# EAGLE board PRoMo_Base_CMS (EAGLE 6.4)

Size 48 x 98 mm. Coordinates in mm from the lower left corner, seen from the top.
Outline: 0,0 48,0 48,98 0,98 0,0
Copper layers (1*2*15*16): Top 0.035mm / dielectric 0.2mm / Route2 0.0175mm / dielectric 1.1mm / Route15 0.0175mm / dielectric 0.2mm / Bottom 0.035mm
Design rules "SeeedStudio_DRU_no_angle_20130527": minimum track width 6mil, minimum drill 12mil, track to track 6mil, track to pad 6mil, pad to pad 6mil, via to via 6mil, smd to smd 0mil, copper to edge 10mil, drill to drill 10mil, minimum pad ring 6mil, minimum via ring 6mil, stop-mask expansion 2mil, vias tented up to drill 25mil, thermal gap 10mil

## Footprints (pad centres in the part's own frame; a part is rotated, then mirrored left to right if it is on the bottom)
4P-6.2X6.2 = drill 1.016 pad 1.651 square: 1 -3.937,2.159 | drill 1.016 pad 1.651: 2 -3.937,-2.159; 3 3.937,-2.159; 4 3.937,2.159
ELECTRO-5.3MM = drill 0.8 pad 1.35 square: + -1,0 | drill 0.8 pad 1.35: - 1,0
C1206 = smd 1.27 x 2.032: 1 -1.651,0; 2 1.651,0
DO-214AB = smd 2.286 x 4.064: 1 -3.683,0; 2 3.683,0
TQFP44 = smd 1.5 x 0.5: 1 -5.8,4; 2 -5.8,3.2; 3 -5.8,2.4; 4 -5.8,1.6; 5 -5.8,0.8; 6 -5.8,0; 7 -5.8,-0.8; 8 -5.8,-1.6; 9 -5.8,-2.4; 10 -5.8,-3.2; 11 -5.8,-4; 23 5.8,-4; 24 5.8,-3.2; 25 5.8,-2.4; 26 5.8,-1.6; 27 5.8,-0.8; 28 5.8,0; 29 5.8,0.8; 30 5.8,1.6; 31 5.8,2.4; 32 5.8,3.2; 33 5.8,4 | smd 0.5 x 1.5: 12 -4,-5.8; 13 -3.2,-5.8; 14 -2.4,-5.8; 15 -1.6,-5.8; 16 -0.8,-5.8; 17 0,-5.8; 18 0.8,-5.8; 19 1.6,-5.8; 20 2.4,-5.8; 21 3.2,-5.8; 22 4,-5.8; 34 4,5.8; 35 3.2,5.8; 36 2.4,5.8; 37 1.6,5.8; 38 0.8,5.8; 39 0,5.8; 40 -0.8,5.8; 41 -1.6,5.8; 42 -2.4,5.8; 43 -3.2,5.8; 44 -4,5.8
2P-2.54-65/35MIL = drill 0.889 pad 1.651 square: 1 0,1.27 | drill 0.889 pad 1.651: 2 0,-1.27
MINI-5P = drill 0.635 pad 1.27: DM -1.016,0.75; DP 0.254,0; GND 0.254,-1.524; ID -1.016,-0.75; VCC 0.254,1.524 | drill 0.7 pad 1.27 long: S1 -5.842,3.85; S2 -1.016,3.85; S3 -5.842,-3.85; S4 -1.016,-3.85
20P-2.54 = drill 0.889 pad 1.651 square: 1 -25.4,0 | drill 0.889 pad 1.651: 2 -22.86,0; 3 -20.32,0; 4 -17.78,0; 5 -15.24,0; 6 -12.7,0; 7 -10.16,0; 8 -7.62,0; 9 -5.08,0; 10 -2.54,0; 11 0,0; 12 2.54,0; 13 5.08,0; 14 7.62,0; 15 10.16,0; 16 12.7,0; 17 15.24,0; 18 17.78,0; 19 20.32,0; 20 22.86,0
6P-2.54-60/35MIL = drill 0.889 pad 1.524 square: 1 0,6.35 | drill 0.889 pad 1.524: 2 0,3.81; 3 0,1.27; 4 0,-1.27; 5 0,-3.81; 6 0,-6.35
JP2 = drill 0.914 long: 1 -2.54,0; 2 0,0; 3 2.54,0
LED-1206 = smd 1.5 x 1.5: + -1.6,0; - 1.6,0
BORNIER_COUDEE_3.5 = drill 0.8 pad 1.524 square: GND 2.057,1.27 | drill 0.8 pad 1.524: VCC 5.588,1.27
R1206 = smd 1.27 x 1.524: 1 -1.27,0; 2 1.27,0
R0204/7 = drill 0.813 octagon: 1 -3.81,0; 2 3.81,0
PTH08080W = drill 1.4 pad 2.54: P$1 2.032,10.414; P$2 2.032,6.858; P$3 2.032,3.302; P$4 14.224,2.032; P$5 14.224,11.684
SOT223 = smd 1.27 x 2.286: 1 -2.286,-3.175; 2 0,-3.175; 3 2.286,-3.175 | smd 3.556 x 2.159: TER 0,3.175
SSOP28 = smd 0.4 x 1.5: 1 -4.225,-3.625; 2 -3.575,-3.625; 3 -2.925,-3.625; 4 -2.275,-3.625; 5 -1.625,-3.625; 6 -0.975,-3.625; 7 -0.325,-3.625; 8 0.325,-3.625; 9 0.975,-3.625; 10 1.625,-3.625; 11 2.275,-3.625; 12 2.925,-3.625; 13 3.575,-3.625; 14 4.225,-3.625; 15 4.225,3.625; 16 3.575,3.625; 17 2.925,3.625; 18 2.275,3.625; 19 1.625,3.625; 20 0.975,3.625; 21 0.325,3.625; 22 -0.325,3.625; 23 -0.975,3.625; 24 -1.625,3.625; 25 -2.275,3.625; 26 -2.925,3.625; 27 -3.575,3.625; 28 -4.225,3.625

## Placement (x,y rotation side)
BP_RESET  [4P-6.2X6.2]  -44,47.5 0 top  (outside the outline)
BP_USER  [4P-6.2X6.2]  -36.5,21 0 top  (outside the outline)
C1  100µF  [ELECTRO-5.3MM]  -56,104 0 top  (outside the outline)
C2  100nF  [C1206]  -65.5,85.5 0 top  (outside the outline)
C3  100nF  [C1206]  -65.5,66.5 0 top  (outside the outline)
C4  100nF  [C1206]  -65.5,61 0 top  (outside the outline)
C6  100nF  [C1206]  -65.5,55.5 0 top  (outside the outline)
C7  10µF  [C1206]  -65.5,50 0 top  (outside the outline)
C8  100nF  [C1206]  -33.5,-3.5 0 top  (outside the outline)
C10  100µF  [ELECTRO-5.3MM]  -48,104 0 top  (outside the outline)
C11  10µF  [C1206]  -65.5,81.5 0 top  (outside the outline)
D1  [DO-214AB]  -39.5,104 0 top  (outside the outline)
D2  [DO-214AB]  -39.5,113 0 top  (outside the outline)
IC1  DSPIC33FJ128MC804-PT  [TQFP44]  20.75,38.83 0 top
J1  [2P-2.54-65/35MIL]  -52,37.5 0 top  (outside the outline)
J2  [2P-2.54-65/35MIL]  -52,31.5 0 top  (outside the outline)
J3  [MINI-5P]  5,89.5 270 top
J4  [20P-2.54]  3.5,33 270 top
J5  [6P-2.54-60/35MIL]  14.5,1.5 90 top
J6  [20P-2.54]  44,33.5 270 top
JP1  [JP2]  14,93 270 top
LED3V3  [LED-1206]  -64.5,75 0 top  (outside the outline)
LED5V  [LED-1206]  -57,89 0 top  (outside the outline)
LED_DEBUG1  [LED-1206]  -50.5,25 0 top  (outside the outline)
LED_DEBUG2  [LED-1206]  -45,40.5 0 top  (outside the outline)
LED_RX1  [LED-1206]  -32.5,5 0 top  (outside the outline)
LED_TX1  [LED-1206]  -32.5,0 0 top  (outside the outline)
P1  Bornier  [BORNIER_COUDEE_3.5]  17,89 0 top
R1  56  [R1206]  -58.5,95 0 top  (outside the outline)
R2  10k  [R1206]  -46.5,54.5 0 top  (outside the outline)
R3  56  [R1206]  -48,32 0 top  (outside the outline)
R4  10k  [R1206]  -52,13.5 0 top  (outside the outline)
R5  56  [R1206]  -33.5,11 0 top  (outside the outline)
R6  353  [R0204/7]  -56,98.5 0 top  (outside the outline)
R7  56  [R1206]  -66,71.5 0 top  (outside the outline)
R8  10k  [R1206]  -33.5,-9 0 top  (outside the outline)
R10  56  [R1206]  -46.5,37 0 top  (outside the outline)
R11  56  [R1206]  -28.5,11 0 top  (outside the outline)
REG1  PTH08080W  [PTH08080W]  6.5,70 0 top
U1  CJ1117-3.3-1310190P1  [SOT223]  -65,92.5 0 top  (outside the outline)
U2  FT232R-SSOP28  [SSOP28]  17.5,60 270 top

## Library data of the parts
BP_RESET BP_USER C1-C4 C6-C8 C10 C11 D1 D2 LED3V3 LED5V LED_DEBUG1 LED_DEBUG2 LED_RX1 LED_TX1 R1-R8 R10 R11 = Discrete
IC1 = microchip-dspic33fjxxmc
J1-J6 = Connector 
JP1 = jumper
P1 REG1 = Perso
U1 = OPL
U2 = IC

## Nets
!MCLR!: BP_RESET.1 BP_RESET.4 IC1.18 J5.1 R2.1
+3V3: C3.1 C4.1 C6.1 C11.1 IC1.17 IC1.28 IC1.40 J5.2 R2.2 R4.2 R5.2 R7.1 R11.2 U1.2 U1.TER U2.4
+5V: C1.+ C2.1 D2.1 J3.VCC JP1.3 R1.1 R8.1 REG1.P$5 U1.3 U2.20
AN0: IC1.19
AN1: IC1.20
AN4: IC1.23
AN5/MISO: IC1.24
AN6/MOSI: IC1.25
AN7/CSN: IC1.26
AN8/SCK: IC1.27
BP_USER: BP_USER.1 BP_USER.4 IC1.30 R4.1
D+: J3.DP U2.15
D-: J3.DM U2.16
LED_DEBUG1: IC1.31 J2.2
LED_DEBUG2: IC1.32 J1.2
N$1: C10.+ D1.2 D2.2 REG1.P$1
N$2: R6.2 REG1.P$4
N$3: LED5V.+ R1.2
N$4: JP1.2 P1.VCC
N$5: LED_DEBUG1.+ R3.1
N$6: J2.1 R3.2
N$7: LED3V3.+ R7.2
N$8: C8.2 U2.17
N$9: R8.2 U2.19
N$14: LED_DEBUG2.+ R10.1
N$15: LED_TX1.- U2.23
N$16: J1.1 R10.2
N$17: LED_TX1.+ R5.1
N$18: LED_RX1.+ R11.1
N$19: LED_RX1.- U2.22
N$25: IC1.33
N$26: IC1.34
N$27: IC1.35
N$28: IC1.36
PE: BP_RESET.2 BP_RESET.3 BP_USER.2 BP_USER.3 C1.- C2.2 C3.2 C4.2 C6.2 C7.2 C8.1 C10.- C11.2 IC1.6 IC1.16 IC1.29 IC1.39 J3.GND J3.S1 J3.S2 J3.S3 J3.S4 J5.3 LED3V3.- LED5V.- LED_DEBUG1.- LED_DEBUG2.- P1.GND R6.1 REG1.P$3 U1.1 U2.7 U2.18 U2.21 U2.25 U2.26
PGEC: IC1.22 J5.5
PGED: IC1.21 J5.4
PWM1H: IC1.14
PWM1L: IC1.15
PWM2H: IC1.10
PWM2L: IC1.11
PWM3H/GPIO: IC1.2
PWM3L/GPIO: IC1.3
QE1A: IC1.9
QE1B: IC1.8
QE2A: IC1.5
QE2B: IC1.4
RX: IC1.38 U2.1
SDA/GPIO: IC1.41
SDL/GPIO: IC1.42
SENS1: IC1.13
SENS2: IC1.12
SENS3/GPIO: IC1.1
TX: IC1.37 U2.5
UART2_: IC1.44
UART2_AX12: IC1.43
V+: D1.1 JP1.1
VCAP: C7.1 IC1.7

## Tracks (layer width: path | path; a pad name or v marks a point on that pad's centre or on a via)
!MCLR!  (4 unrouted)
+3V3  (15 unrouted)
+5V  (9 unrouted)
BP_USER  (3 unrouted)
D+  (1 unrouted)
D-  (1 unrouted)
LED_DEBUG1  (1 unrouted)
LED_DEBUG2  (1 unrouted)
N$1  (3 unrouted)
N$2  (1 unrouted)
N$3  (1 unrouted)
N$4  (1 unrouted)
N$5  (1 unrouted)
N$6  (1 unrouted)
N$7  (1 unrouted)
N$8  (1 unrouted)
N$9  (1 unrouted)
N$14  (1 unrouted)
N$15  (1 unrouted)
N$16  (1 unrouted)
N$17  (1 unrouted)
N$18  (1 unrouted)
N$19  (1 unrouted)
PE  (35 unrouted)
PGEC  (1 unrouted)
PGED  (1 unrouted)
RX  (1 unrouted)
TX  (1 unrouted)
V+  (1 unrouted)
VCAP  (1 unrouted)